# Altium PCB Arduino_MEGA_2560-Rev3.PcbDoc (part 2 of 2)
Units mm, origin at the board's own origin, x right, y up, seen from the top; angles counter-clockwise.
Board outline 101.6 x 53.34 mm, 2 copper layers (Top, Bottom); 63 components, 112 nets, 394 pads, 154 vias.
Unrouted connection lines stored in the file: 1.
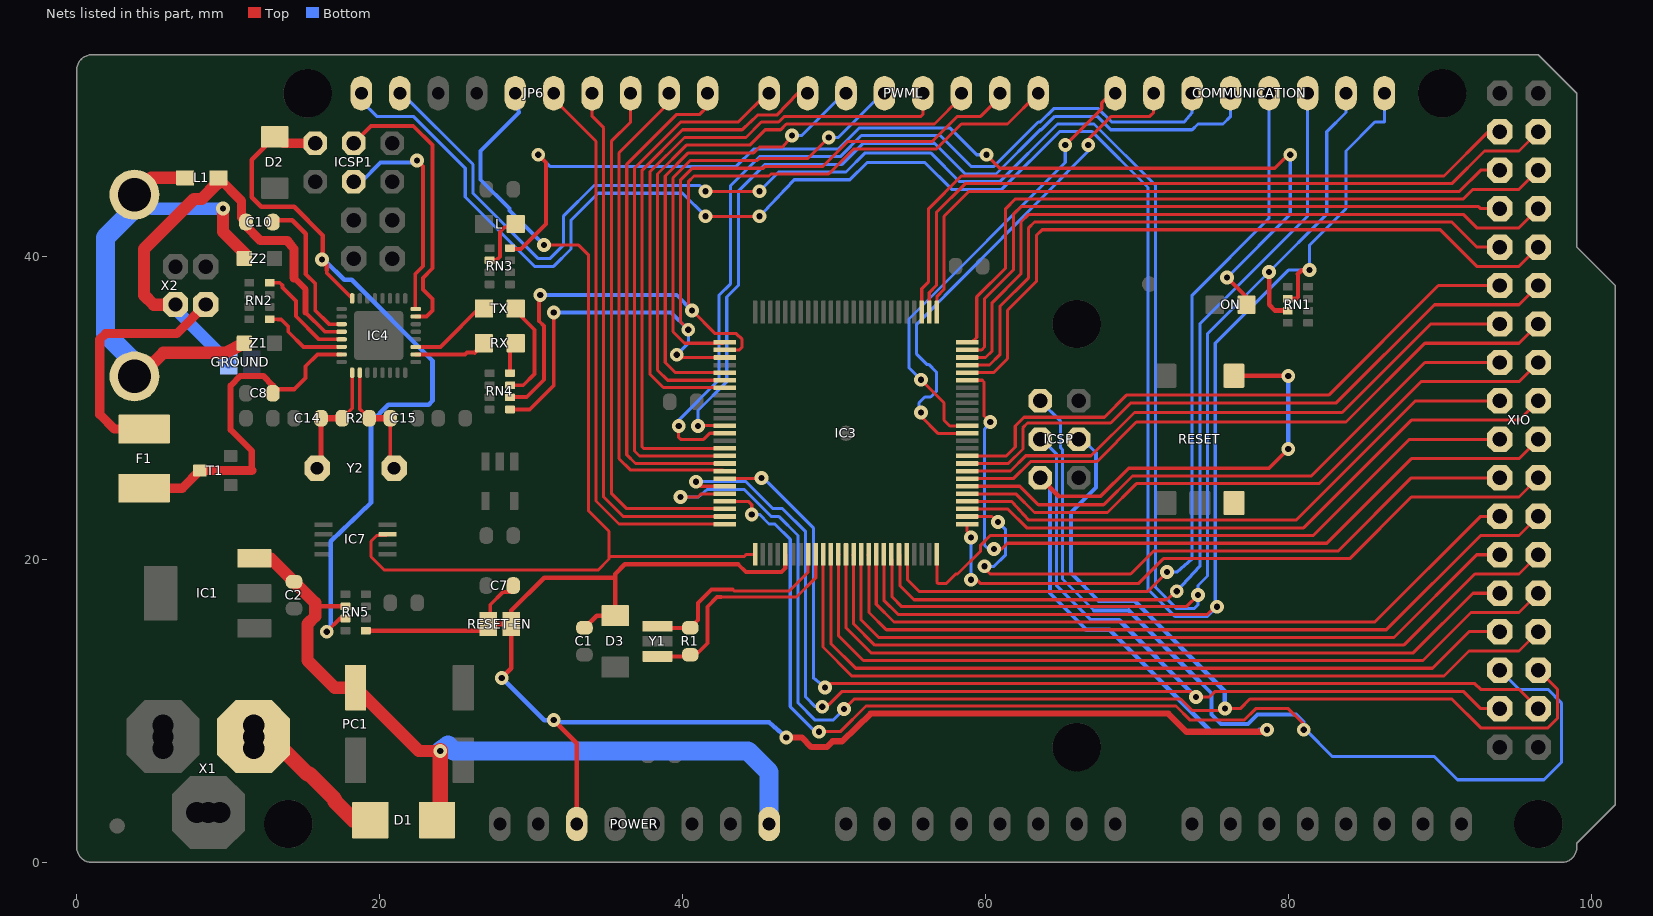
[diagram p2: the nets of this part, all layers, seen from the top]

## Via types
v1: diameter 0.914/0.914 (per signal layer), hole 0.406, Top to Bottom, 154 vias

## Nets (pads, with @x,y where several pads share a name; then routed paths per layer and width w, separated by ;. In a path a pad name is that pad's centre, name@x,y a point inside that pad or via, vN(x,y) a via of type N, cw(c..) or ccw(c..) an arc to the next point about the centre after c; other vN are vias at no path point) (continued)
MOSI2: IC4.16 ICSP1.4 | length 15
  Top w0.254: IC4.16@22.389,36.548 22.389,36.613 22.352,36.703 22.352,38.862 22.86,39.37 22.86,45.974 v1(22.479,46.355)
  Bottom w0.254: ICSP1.4@18.288,44.958 18.796,44.958 20.066,46.228 22.225,46.228 22.352,46.355 v1(22.479,46.355)
N$1: 
N$2: L.A RN3.2 | length 3.6
  Top w0.254: RN3.2@27.265,39.77 27.756,39.821 27.94,40.005 27.94,41.656 28.194,41.91 L.A@28.99,42.164
N$3: ON.A RN3.8 | length 72.5
  Top w0.203: v1(60.071,46.736) 60.96,45.847 79.121,45.847 80.01,46.736 v1(80.137,46.736) ; ON.A@77.216,37.084 ON.A@77.25,36.83
  Top w0.254: RN3.8@28.615,40.57 28.888,40.513 29.337,40.513 30.988,42.164 30.988,46.228 v1(30.48,46.736) ; v1(75.962,38.624) 77.216,37.37 ON.A@77.216,37.084
  Bottom w0.203: v1(30.48,46.736) 31.242,45.974 43.561,45.974 44.704,47.117 50.292,47.117 51.689,48.514 57.658,48.514 59.436,46.736 59.944,46.736 v1(60.071,46.736) ; v1(75.962,38.624) 80.137,42.799 v1(80.137,46.736)
N$54: RN4.4 RX.A | length 2.1
  Top w0.254: RN4.4@28.615,32.315 28.615,33.822 RX.A@28.99,34.29
N$55: RN4.3 TX.A | length 6.7
  Top w0.254: RN4.3@28.615,31.515 29.483,31.515 30.226,32.258 30.226,35.179 28.99,36.415 TX.A@28.99,36.576
PA0: IC3.78 XIO.3 | length 46.8
  Top w0.203: IC3.78@55.8,36.346 55.8,37.893 56.261,38.354 56.261,43.18 58.42,45.339 90.297,45.339 93.218,48.26 XIO.3@93.98,48.26
PA1: IC3.77 XIO.4 | length 48.7
  Top w0.203: IC3.77@56.3,36.346 56.3,37.631 56.769,38.1 56.769,42.926 58.674,44.831 90.805,44.831 92.964,46.99 95.25,46.99 XIO.4@96.52,48.26
PA2: IC3.76 XIO.5 | length 44.5
  Top w0.203: IC3.76@56.8,36.346 56.8,37.369 57.277,37.846 57.277,42.672 58.928,44.323 91.313,44.323 92.71,45.72 XIO.5@93.98,45.72
PA3: IC3.75 XIO.6 | length 46.3
  Top w0.203: IC3.75@58.8,34.346 59.111,34.346 59.436,34.671 59.436,37.354 61.341,39.259 61.341,43.18 61.976,43.815 91.567,43.815 92.202,44.45 95.25,44.45 XIO.6@96.52,45.72
PA4: IC3.74 XIO.7 | length 43.2
  Top w0.203: IC3.74@58.8,33.847 59.755,33.847 59.944,34.036 59.944,37.227 61.849,39.132 61.849,42.799 62.357,43.307 92.583,43.307 92.71,43.18 XIO.7@93.98,43.18
PA5: IC3.73 XIO.8 | length 46.4
  Top w0.203: IC3.73@58.8,33.346 60.016,33.346 60.452,33.782 60.452,36.973 62.357,38.878 62.357,42.291 62.865,42.799 91.567,42.799 92.456,41.91 95.25,41.91 XIO.8@96.52,43.18
PA6: IC3.72 XIO.9 | length 43.6
  Top w0.203: IC3.72@58.8,32.847 60.279,32.847 60.96,33.528 60.96,36.719 62.865,38.624 62.865,41.91 63.246,42.291 90.805,42.291 92.456,40.64 XIO.9@93.98,40.64
PA7: IC3.71 XIO.10 | length 46.8
  Top w0.203: IC3.71@58.8,32.346 60.54,32.346 61.468,33.274 61.468,36.465 63.373,38.37 63.373,41.402 63.754,41.783 90.043,41.783 92.456,39.37 95.25,39.37 XIO.10@96.52,40.64
PB0: IC3.19 XIO.34 | length 66.4
  Top w0.203: IC3.19@42.8,25.346 45.393,25.346 v1(45.212,25.4) ; v1(49.403,11.557) 49.53,11.557 49.784,11.811 92.329,11.811 92.71,11.43 95.25,11.43 XIO.34@96.52,10.16
  Bottom w0.203: v1(45.212,25.4) 45.339,25.4 48.641,22.098 48.641,12.192 v1(49.403,11.557)
PB1: IC3.20 ICSP.3 XIO.33 | length 91.3
  Top w0.203: v1(40.894,25.146) 41.194,24.846 IC3.20@42.8,24.846 ; v1(49.23,10.287) 49.53,10.287 50.546,11.303 73.533,11.303 v1(73.914,10.922) 74.803,10.922 75.184,11.303 91.567,11.303 92.71,10.16 XIO.33@93.98,10.16
  Bottom w0.203: v1(40.894,25.146) 44.196,25.146 45.974,23.368 46.609,23.368 48.133,21.844 48.133,10.922 48.768,10.287 v1(49.23,10.287) ; ICSP.3@63.754,27.94 64.694,27 64.694,18.308 67,16.002
  Bottom w0.254: ICSP.3@63.627,27.94 ICSP.3@63.754,27.94
  Bottom w0.305: 67,16.002 68.834,16.002 v1(73.914,10.922)
PB2: IC3.21 ICSP.4 XIO.32 | length 104.5
  Top w0.203: v1(39.878,24.13) 41.021,24.13 41.237,24.346 IC3.21@42.8,24.346 ; v1(50.673,10.125) 51.343,10.795 72.898,10.795 73.66,10.033 75.692,10.033 v1(75.819,10.16) 76.835,10.16 77.47,10.795 90.805,10.795 92.71,8.89 97.155,8.89 97.79,9.525 97.79,11.43 XIO.32@96.52,12.7
  Bottom w0.203: v1(39.878,24.13) 41.021,24.13 41.656,24.638 44.069,24.638 45.847,22.86 46.355,22.86 47.625,21.59 47.625,10.541 48.768,9.398 49.946,9.398 v1(50.673,10.125) ; ICSP.4@66.167,27.94 66.421,27.94 67.31,27.051
  Bottom w0.254: 67.31,27.051 67.31,24.765 65.659,23.114 65.659,19.105 67.492,17.272
  Bottom w0.305: 67.492,17.272 69.85,17.272 75.819,11.303 v1(75.819,10.16)
PB3: IC3.22 ICSP.1 XIO.31 | length 115.4
  Top w0.203: IC3.22@42.8,23.846 44.353,23.846 44.577,23.622 v1(44.577,22.987) ; v1(49.022,8.636) 50.419,8.636 52.121,10.338 72.593,10.338 73.533,9.398 77.089,9.398 77.851,10.16 80.01,10.16 81.026,9.144 v1(81.026,8.763)
  Bottom w0.203: v1(44.577,22.987) 45.085,22.987 45.72,22.352 46.101,22.352 47.117,21.336 47.117,10.287 48.768,8.636 v1(49.022,8.636) ; ICSP.1@63.627,30.48 64.973,29.134 64.973,27.381 65.1,27.254 65.1,18.72 67.183,16.637 ; v1(81.026,8.763) 81.153,8.763 82.931,6.985 89.662,6.985 91.186,5.461 96.901,5.461 98.044,6.604 98.044,10.541 97.155,11.43 95.25,11.43 XIO.31@93.98,12.7
  Bottom w0.254: 67.183,16.637 69.469,16.637 ; 74.168,11.938 74.93,11.176 74.93,9.779 75.565,9.144 77.343,9.144 77.978,9.779 80.518,9.779 81.026,9.271 v1(81.026,8.763)
  Bottom w0.305: 69.469,16.637 74.168,11.938
PB4: IC3.23 JP6.8 | length 35.1
  Top w0.203: JP6.8@36.576,50.8 36.576,48.895 35.306,47.625 35.306,24.384 36.322,23.368 42.926,23.368 42.904,23.346 IC3.23@42.8,23.346
PB5: IC3.24 JP6.7 | length 35.5
  Top w0.203: JP6.7@34.036,50.8 34.036,49.276 34.798,48.514 34.798,24.13 36.082,22.846 IC3.24@42.8,22.846
PB6: IC3.25 JP6.6 | length 37.4
  Top w0.203: JP6.6@31.496,50.8 31.75,50.165 34.29,47.625 34.29,23.876 35.814,22.352 42.926,22.352 42.92,22.346 IC3.25@42.8,22.346
PB7: IC3.26 IC7.3 JP6.5 | length 65.1
  Top w0.203: IC7.3@20.528,21.66 20.458,21.59 19.812,21.59 19.431,21.209 19.431,20.193 20.32,19.304 34.417,19.304 35.153,20.04 35.153,20.219 ; v1(30.861,40.767) 33.147,40.767 33.782,40.132 33.782,23.241 35.153,21.87 35.153,20.219 ; 37.566,20.193 37.592,20.219 ; IC3.26@44.8,20.346 44.221,20.345 44.095,20.219 37.592,20.219 ; 35.153,20.219 37.592,20.219
  Bottom w0.254: JP6.5@28.956,50.8 29.21,49.53 26.67,46.99 26.67,45.085 28.575,43.18 28.575,43.053 v1(30.861,40.767)
PC0: IC3.53 XIO.18 | length 41.7
  Top w0.203: IC3.53@58.8,23.346 61.49,23.346 62.738,22.098 81.026,22.098 88.138,29.21 95.25,29.21 XIO.18@96.52,30.48
PC1: IC3.54 XIO.17 | length 39
  Top w0.203: IC3.54@58.8,23.846 61.752,23.846 62.865,22.606 80.518,22.606 88.392,30.48 XIO.17@93.98,30.48
PC2: IC3.55 XIO.16 | length 42.3
  Top w0.203: IC3.55@58.8,24.346 62.014,24.346 63.246,23.114 68.072,23.114 69.977,25.019 82.042,25.019 88.773,31.75 95.25,31.75 XIO.16@96.52,33.02
PC3: IC3.56 XIO.15 | length 39.6
  Top w0.203: IC3.56@58.8,24.846 62.276,24.846 63.5,23.622 67.818,23.622 69.723,25.527 81.534,25.527 89.027,33.02 XIO.15@93.98,33.02
PC4: IC3.57 XIO.14 | length 41.9
  Top w0.203: IC3.57@58.8,25.346 61.849,25.349 62.992,26.479 67.386,26.479 69.977,29.083 83.82,29.083 89.027,34.29 95.25,34.29 XIO.14@96.52,35.56
PC5: IC3.58 XIO.13 | length 39.2
  Top w0.203: IC3.58@58.8,25.846 61.66,25.846 62.662,26.86 66.98,26.86 69.85,29.718 83.566,29.718 89.408,35.56 XIO.13@93.98,35.56
PC6: IC3.59 XIO.12 | length 43.4
  Top w0.203: IC3.59@58.8,26.346 61.525,26.346 62.484,27.305 62.484,28.702 62.789,29.019 68.275,29.019 69.621,30.353 83.185,30.353 89.662,36.83 95.25,36.83 XIO.12@96.52,38.1
PC7: IC3.60 XIO.11 | length 40.7
  Top w0.203: IC3.60@58.8,26.846 61.39,26.846 61.976,27.432 61.976,28.829 62.56,29.4 67.869,29.4 69.317,30.861 82.677,30.861 89.916,38.1 XIO.11@93.98,38.1
PD7: IC3.50 XIO.19 | length 43.2
  Top w0.203: IC3.50@56.8,20.346 56.8,18.511 56.896,18.415 57.404,18.415 58.039,19.05 58.166,19.05 59.69,20.574 59.69,20.955 60.3,21.565 60.3,21.59 81.661,21.59 88.011,27.94 XIO.19@93.98,27.94
PE0: IC3.2 PWML.1 RN4.2 | length 58.9
  Top w0.203: IC3.2@42.8,33.847 43.753,33.847 43.942,34.036 43.942,34.544 43.561,34.925 42.164,34.925 v1(40.64,36.449) 40.386,36.703 40.386,44.958 40.767,45.339 45.72,45.339 45.847,45.466 49.657,45.466 51.308,47.117 56.769,47.117 58.42,48.768 61.468,48.768 PWML.1@63.5,50.8
  Top w0.254: RN4.2@28.615,30.715 28.634,30.734 29.718,30.734 30.861,31.877 30.861,35.433 30.537,35.744 30.537,37.395 v1(30.607,37.465)
  Bottom w0.254: v1(30.607,37.465) 39.624,37.465 v1(40.64,36.449)
PE1: IC3.3 PWML.2 RN4.1 | length 56.7
  Top w0.203: v1(39.624,33.528) 39.878,33.274 39.95,33.346 IC3.3@42.8,33.346 ; v1(40.386,35.179) 39.878,35.687 39.878,45.085 40.64,45.847 45.339,45.847 45.466,45.974 49.276,45.974 50.927,47.625 56.515,47.625 58.166,49.276 59.69,49.276 60.96,50.546 PWML.2@60.96,50.8
  Top w0.254: RN4.1@28.615,29.915 29.915,29.915 31.496,31.496 v1(31.496,36.322)
  Bottom w0.203: v1(39.624,33.528) 40.386,34.29 v1(40.386,35.179)
  Bottom w0.254: v1(31.496,36.322) 39.243,36.322 v1(40.386,35.179)
PE3: IC3.5 PWML.6 | length 30.8
  Top w0.203: IC3.5@42.8,32.346 39.536,32.346 38.862,33.02 38.862,45.339 40.386,46.863 44.704,46.863 45.085,47.244 46.609,47.244 v1(47.244,48.006)
  Bottom w0.203: v1(47.244,48.006) 47.879,48.006 50.673,50.8 PWML.6@50.8,50.8
PE4: IC3.6 PWML.3 | length 40.1
  Top w0.203: IC3.6@42.8,31.847 39.019,31.847 38.354,32.512 38.354,45.466 40.259,47.371 44.45,47.371 45.466,48.387 46.482,48.387 46.863,48.768 56.642,48.768 58.42,50.546 PWML.3@58.42,50.8
PE5: IC3.7 PWML.4 | length 39.7
  Top w0.203: IC3.7@42.8,31.346 42.776,31.346 42.545,31.369 38.735,31.369 37.846,32.258 37.846,45.593 40.132,47.879 44.196,47.879 45.212,48.895 46.355,48.895 46.736,49.276 55.753,49.276 55.88,49.403 PWML.4@55.88,50.8
PG0: IC3.51 XIO.22 | length 44.2
  Top w0.203: IC3.51@58.8,22.346 58.8,21.845 v1(59.055,21.463) ; v1(59.055,18.669) 59.436,18.669 59.69,18.415 70.104,18.415 70.358,18.669 71.247,19.558 71.755,20.066 84.074,20.066 88.138,24.13 95.25,24.13 XIO.22@96.52,25.4
  Bottom w0.203: v1(59.055,18.669) v1(59.055,21.463)
PG1: IC3.52 XIO.21 | length 43.2
  Top w0.203: IC3.52@58.8,22.846 60.438,22.846 v1(60.833,22.479) ; v1(59.944,19.558) 59.944,19.431 60.325,19.05 69.596,19.05 71.12,20.574 83.312,20.574 88.138,25.4 XIO.21@93.98,25.4
  Bottom w0.203: v1(59.944,19.558) 60.579,19.558 61.341,20.32 61.341,21.971 v1(60.833,22.479)
PG2: IC3.70 XIO.20 | length 51.9
  Top w0.203: IC3.70@58.8,31.847 59.797,31.847 59.919,31.725 59.919,29.489 v1(60.325,29.083) ; v1(60.579,20.701) 61.087,20.701 61.468,21.082 82.55,21.082 88.138,26.67 95.25,26.67 XIO.20@96.52,27.94
  Bottom w0.203: v1(60.325,29.083) 59.944,28.575 59.944,20.955 60.198,20.701 v1(60.579,20.701)
PG5: IC3.1 PWML.5 | length 30.2
  Top w0.203: IC3.1@42.8,34.346 42.728,34.346 42.672,34.29 40.132,34.29 39.37,35.052 39.37,45.212 40.513,46.355 44.958,46.355 45.085,46.482 48.26,46.482 v1(49.657,47.879)
  Bottom w0.203: v1(49.657,47.879) 50.292,47.879 53.213,50.8 PWML.5@53.34,50.8
PH3: IC3.15 PWML.7 | length 36.8
  Top w0.203: IC3.15@42.8,27.346 37.424,27.346 37.338,27.432 37.338,45.72 40.005,48.387 43.942,48.387 44.958,49.352 46.228,49.352 47.625,50.8 PWML.7@48.26,50.8
PH4: IC3.16 PWML.8 | length 35.7
  Top w0.203: IC3.16@42.8,26.846 37.162,26.846 36.83,27.178 36.83,45.847 39.878,48.895 43.688,48.895 45.593,50.8 PWML.8@45.72,50.8
PH5: IC3.17 JP6.10 | length 33.7
  Top w0.203: JP6.10@41.656,50.8 41.656,49.911 41.148,49.403 39.624,49.403 36.322,46.101 36.322,26.924 36.9,26.346 IC3.17@42.8,26.346
PH6: IC3.18 JP6.9 | length 32.8
  Top w0.203: JP6.9@39.116,50.8 39.116,50.165 35.814,46.863 35.814,26.67 36.576,25.908 42.672,25.908 42.734,25.846 IC3.18@42.8,25.846
PL0: IC3.35 XIO.30 | length 55.4
  Top w0.203: IC3.35@49.276,20.295 49.276,14.224 51.181,12.319 90.297,12.319 91.948,13.97 95.25,13.97 XIO.30@96.52,15.24
  Top w0.254: IC3.35@49.276,20.295 49.301,20.32 49.302,20.346 IC3.35@49.3,20.346
PL1: IC3.36 XIO.29 | length 51.7
  Top w0.203: IC3.36@49.8,20.346 49.8,14.462 51.435,12.827 89.535,12.827 91.948,15.24 XIO.29@93.98,15.24
PL2: IC3.37 XIO.28 | length 54.1
  Top w0.203: IC3.37@50.292,20.295 50.292,14.986 51.943,13.335 88.9,13.335 92.075,16.51 95.25,16.51 XIO.28@96.52,17.78
  Top w0.254: IC3.37@50.292,20.295 50.267,20.32 50.293,20.346 IC3.37@50.3,20.346
PL3: IC3.38 XIO.27 | length 50.3
  Top w0.203: IC3.38@50.8,20.346 50.8,15.494 52.451,13.843 88.265,13.843 92.202,17.78 XIO.27@93.98,17.78
PL4: IC3.39 XIO.26 | length 52.9
  Top w0.203: IC3.39@51.308,20.218 51.308,15.748 52.705,14.351 87.63,14.351 92.329,19.05 95.25,19.05 XIO.26@96.52,20.32
  Top w0.254: IC3.39@51.3,20.346 51.3,20.277 51.333,20.244 IC3.39@51.308,20.218
PL5: IC3.40 XIO.25 | length 49.3
  Top w0.203: IC3.40@51.8,20.346 51.8,16.018 52.959,14.859 86.995,14.859 92.456,20.32 XIO.25@93.98,20.32
PL6: IC3.41 XIO.24 | length 51.6
  Top w0.203: IC3.41@52.324,20.244 52.324,16.51 53.467,15.367 86.487,15.367 92.71,21.59 95.25,21.59 XIO.24@96.52,22.86
  Top w0.254: IC3.41@52.3,20.346 52.3,20.322 52.273,20.295 IC3.41@52.324,20.244
PL7: IC3.42 XIO.23 | length 47.9
  Top w0.203: IC3.42@52.8,20.346 52.8,17.05 53.975,15.875 85.725,15.875 92.71,22.86 XIO.23@93.98,22.86
PWRIN: D1.A X1.2 X1.8 X1.9 | length 10.1
  Top w1.016: X1.2@11.684,8.306 12.37,7.62 13.462,7.62 15.24,5.842 15.367,5.842 17.018,4.191 17.018,4.064 18.288,2.794 D1.A@19.39,2.794
RD+: IC4.29 RN2.4 | length 7
  Top w0.254: RN2.4@12.74,38.284 13.405,38.284 13.589,38.1 13.589,37.973 14.478,37.084 14.478,36.068 15.998,34.548 IC4.29@17.489,34.548
RD-: IC4.30 RN2.1 | length 5.7
  Top w0.254: RN2.1@12.74,35.884 13.279,35.853 13.501,35.853 13.97,35.384 13.97,35.052 14.974,34.048 IC4.30@17.489,34.048
RESET: C1.1 C7.2 D3.A IC3.30 ICSP.5 POWER.3 RESET-EN.1 RESET-EN.2 RESET.3 RESET.4 RN5.1 | length 158.1
  Top w0.254: RESET-EN.1@27.178,15.748 27.305,15.875 27.305,17.018 28.155,17.868 C7.2@28.79,17.868 ; 43.688,19.685 44.196,19.177 46.533,19.177 46.8,19.444 ; 64.846,24.181 67.615,24.181 69.469,26.035 78.74,26.035 v1(80.01,27.305)
  Top w0.305: RN5.1@19.09,15.31 26.74,15.31 RESET-EN.1@27.178,15.748 ; RESET-EN.1@27.305,15.367 RESET-EN.1@27.178,15.748 ; v1(28.067,12.192) 28.702,12.827 RESET-EN.2@28.702,15.748 ; C7.2@28.79,17.868 C7.2@28.829,18.288 ; v1(31.496,9.398) 33.02,7.874 POWER.3@33.02,2.54 ; C1.1@33.528,15.494 34.339,16.305 D3.A@35.56,16.305 35.56,18.796 ; 43.688,19.685 36.195,19.685 35.56,19.05 35.56,18.796 ; 46.8,19.444 IC3.30@46.8,20.346 ; ICSP.5@63.627,25.4 64.846,24.181 ; RESET.4@76.418,32.14 76.427,32.131 v1(80.01,32.131) ; RESET-EN.1@27.178,15.748 RESET-EN.2@28.702,15.748 ; RESET-EN.2@28.702,15.748 28.702,16.637 30.861,18.796 35.56,18.796
  Top w0.406: v1(46.855,8.263) 47.879,8.255 48.514,7.62 49.53,7.62 49.911,8.001 50.546,8.001 52.426,9.83 72.085,9.83 73.279,8.636 78.486,8.636 v1(78.613,8.763)
  Bottom w0.254: ICSP.5@63.754,25.273 64.262,24.765 64.262,17.78 66.675,15.367
  Bottom w0.305: v1(28.067,12.192) 30.861,9.398 v1(31.496,9.398) 31.623,9.271 45.72,9.271 v1(46.855,8.263) ; ICSP.5@63.627,25.4 ICSP.5@63.754,25.273 ; 66.675,15.367 68.199,15.367 74.93,8.636 77.978,8.636 78.105,8.763 v1(78.613,8.763) ; v1(80.01,27.305) v1(80.01,32.131)
RESET2: D2.A IC4.24 ICSP1.5 RN5.7 | length 53.4
  Top w0.254: v1(16.51,15.24) 17.38,16.11 RN5.7@17.74,16.11 ; 16.51,39.116 16.51,38.927 IC4.24@18.189,37.248
  Top w0.305: D2.A@13.081,47.928 11.557,46.404 11.557,43.942 12.192,43.307 14.351,43.307 16.256,41.402 16.256,39.751 v1(16.192,39.814) 16.51,39.497 16.51,39.116 ; ICSP1.5@14.986,47.498 ICSP1.5@15.748,47.498 ; v1(16.51,15.24) v1@16.58,15.31
  Top w0.61: D2.A@13.081,47.928 13.638,47.498 ICSP1.5@15.748,47.498
  Bottom w0.305: v1(16.192,39.814) 16.447,39.688 17.653,38.481 18.147,38.481 23.495,33.133 23.495,30.48 23.241,30.226 20.574,30.226 19.431,29.083 19.431,23.749 16.764,21.209 16.764,15.24 v1(16.51,15.24)
RXD1: COMMUNICATION.3 IC3.45 | length 57.4
  Top w0.203: IC3.45@54.3,20.346 54.33,20.346 54.356,20.32 54.356,18.288 55.296,17.348 71.958,17.348 v1(72.644,17.907)
  Bottom w0.203: v1(72.644,17.907) 74.168,19.558 74.168,35.56 81.28,42.672 COMMUNICATION.3@81.28,50.8
RXD2: COMMUNICATION.5 IC3.12 | length 56.9
  Top w0.203: v1(41.021,28.829) 41.039,28.847 IC3.12@42.8,28.847
  Bottom w0.203: v1(41.021,28.829) 41.021,29.845 42.926,31.75 42.926,37.338 43.688,38.1 43.688,44.323 45.466,46.101 50.546,46.101 51.943,47.498 56.642,47.498 58.674,45.466 60.706,45.466 63.627,48.387 63.703,48.387 64.592,49.276 67.386,49.276 68.275,48.387 73.66,48.387 74.041,48.768 75.692,48.768 76.2,49.276 COMMUNICATION.5@76.2,50.8
RXD3: COMMUNICATION.7 IC3.63 | length 34.2
  Top w0.203: v1(55.753,29.718) 55.753,29.464 56.896,28.321 58.801,28.321 IC3.63@58.8,28.346 ; v1(66.802,47.371) 66.802,47.752 68.326,49.276 70.866,49.276 71.12,49.53 COMMUNICATION.7@71.12,50.8
  Bottom w0.203: v1(55.753,29.718) 55.626,29.845 55.626,30.353 56.007,30.734 56.388,30.734 56.769,31.115 56.769,32.385 56.261,32.893 56.134,32.893 55.448,33.604 55.448,35.509 66.802,46.99 v1(66.802,47.371)
RXL: IC4.10 RX.C | length 4.8
  Top w0.254: IC4.10@22.389,33.548 25.634,33.548 25.761,33.675 26.275,33.675
  Top w0.305: 26.275,33.675 RX.C@26.89,34.29
SCK2: IC4.15 ICSP1.3 | length 18.9
  Top w0.254: ICSP1.3@18.288,47.498 19.431,48.641 22.225,48.641 23.495,47.371 23.495,39.243 22.86,38.608 22.86,37.846 23.495,37.211 23.495,36.449 23.094,36.048 IC4.15@22.389,36.048
SCL: COMMUNICATION.1 IC3.43 JP6.1 RN1.2 | length 167.8
  Top w0.203: v1(41.529,42.672) v1(45.085,42.672) ; IC3.43@53.3,20.346 53.3,17.312 54.229,16.383 74.676,16.383 75.057,16.764 v1(75.311,16.891)
  Top w0.254: 80.537,37.23 80.645,37.338 80.645,38.862
  Top w0.305: RN1.2@79.97,37.23 80.537,37.23 ; 80.645,38.862 80.899,39.116 v1(81.407,39.116)
  Bottom w0.203: JP6.1@18.796,50.8 18.796,50.292 19.812,49.276 22.225,49.276 25.654,45.847 25.654,43.942 30.226,39.37 31.496,39.37 32.639,40.513 32.639,42.418 34.417,44.196 40.005,44.196 v1(41.529,42.672) ; v1(45.085,42.672) 45.339,42.926 47.371,45.085 51.054,45.085 52.197,46.228 56.007,46.228 57.785,44.45 61.087,44.45 64.897,48.26 67.056,48.26 70.739,44.577 70.739,18.034 72.517,16.256 74.676,16.256 v1(75.311,16.891) 75.184,17.018 75.184,34.29 80.01,39.116 v1(81.407,39.116) 81.407,40.767 83.82,43.18 83.82,46.99 85.725,48.895 86.36,48.895 COMMUNICATION.1@86.36,50.8
SDA: COMMUNICATION.2 IC3.44 JP6.2 RN1.3 | length 158.9
  Top w0.203: v1(41.529,44.323) v1(45.085,44.323) ; IC3.44@53.8,20.346 53.8,20.145 53.797,20.041 53.848,19.939 53.848,17.526 54.483,16.891 73.279,16.891 v1(74.041,17.653)
  Top w0.305: v1(78.74,38.989) 78.74,36.83 79.121,36.449 79.951,36.449 RN1.3@79.97,36.43
  Bottom w0.203: JP6.2@21.336,50.8 21.463,50.8 26.162,46.101 26.162,44.196 30.48,39.878 31.242,39.878 32.131,40.767 32.131,42.672 34.163,44.704 41.148,44.704 v1(41.529,44.323) ; v1(45.085,44.323) 46.355,45.593 50.8,45.593 52.07,46.863 56.388,46.863 58.293,44.958 60.96,44.958 64.77,48.768 67.183,48.768 71.247,44.704 71.247,18.161 72.644,16.764 73.787,16.764 74.041,17.018 v1(74.041,17.653) 74.041,18.288 74.676,18.923 74.676,34.925 v1(78.74,38.989) 82.55,42.799 82.55,48.26 83.82,49.53 COMMUNICATION.2@83.82,50.8
TXD1: COMMUNICATION.4 IC3.46 | length 54.5
  Top w0.203: IC3.46@54.8,20.346 54.8,20.257 54.864,20.193 54.864,18.669 55.626,17.907 70.739,17.907 v1(72.009,19.177)
  Bottom w0.203: v1(72.009,19.177) 72.644,19.177 73.66,20.066 73.66,37.465 78.74,42.545 COMMUNICATION.4@78.74,50.8
TXD2: COMMUNICATION.6 IC3.13 | length 57.5
  Top w0.203: v1(39.751,28.829) 39.751,28.067 39.878,27.94 41.402,27.94 41.808,28.346 IC3.13@42.8,28.346
  Bottom w0.203: v1(39.751,28.829) 39.751,29.21 42.418,31.877 42.418,37.465 43.18,38.227 43.18,44.704 45.085,46.609 50.419,46.609 51.816,48.006 57.023,48.006 59.055,45.974 60.579,45.974 63.5,48.895 63.627,48.895 64.516,49.784 67.462,49.784 68.351,48.895 73.152,48.895 73.66,49.53 COMMUNICATION.6@73.66,50.8
TXD3: COMMUNICATION.8 IC3.64 | length 30
  Top w0.203: v1(55.753,31.877) 57.277,30.353 57.277,29.21 57.658,28.829 58.547,28.829 58.657,28.847 IC3.64@58.8,28.847 ; v1(65.278,47.371) 67.691,49.784 67.691,50.165 68.326,50.8 COMMUNICATION.8@68.58,50.8
  Bottom w0.203: v1(55.753,31.877) 54.966,32.664 54.966,35.89 65.278,46.228 v1(65.278,47.371)
TXL: IC4.11 TX.C | length 5.8
  Top w0.254: IC4.11@22.389,34.048 24.015,34.048 26.797,36.83 TX.C@26.89,36.576
UGND: C10.2 GROUND.1 IC4.28 L1.1 X2.4 | length 33
  Top w0.254: 15.113,36.322 16.387,35.048 IC4.28@17.489,35.048
  Top w0.406: 14.351,38.608 15.113,37.846 15.113,36.322
  Top w0.61: L1.1@9.355,45.212 10.879,43.688 10.879,42.588 C10.2@11.176,42.291 11.088,42.125 12.116,41.072 13.894,41.072 14.351,40.513 14.351,38.608
  Top w0.813: X2.4@6.52,36.85 6.5,36.83 5.08,36.83 4.445,37.465 4.445,40.513 7.747,43.815 8.255,43.815 9.271,44.831 9.271,45.128 L1.1@9.355,45.212
  Bottom w0.813: X2.4@6.52,36.85 6.52,36.533 GROUND.1@10.033,33.02
USBVCC: C8.1 F1.1 IC4.31 T1.1 | length 23.7
  Top w0.254: 14.351,31.242 15.113,32.004 15.113,32.766 15.895,33.548 IC4.31@17.489,33.548
  Top w0.305: C8.1@12.954,30.988 13.208,31.242 14.351,31.242
  Top w0.406: 11.557,25.883 11.557,27.178 10.16,28.575 10.16,31.496 10.795,32.131 12.319,32.131 12.954,31.496 C8.1@12.954,30.988
  Top w0.61: F1.1@4.445,24.72 6.965,24.72 T1.1@8.128,25.883 11.557,25.883
USHIELD: L1.2 X2.P$1 X2.P$2 Z1.1 Z2.1 | length 36
  Top w0.813: X2.P$2@3.81,32.1 3.81,33.02 5.08,33.02 5.715,33.655 9.795,33.655 Z1.1@11.065,34.29 ; X2.P$1@3.81,44.1 4.922,45.212 L1.2@7.155,45.212 ; v1(9.652,43.18) 9.652,41.656 11.065,40.243 Z2.1@11.065,39.878
  Bottom w0.813: X2.P$1@3.81,44.1 4.984,43.18 v1(9.652,43.18)
  Bottom w1.27: X2.P$2@3.81,32.1 3.81,33.02 1.905,34.925 1.905,41.275 3.81,43.18 X2.P$1@3.81,44.1
VIN: C2.1 D1.C IC1.3 PC1.+ POWER.8 RN5.6 | length 53.2
  Top w0.203: IC1.3@11.735,20.091 IC1.3@11.766,20.06
  Top w0.305: 15.748,17.145 15.983,16.91 RN5.6@17.74,16.91
  Top w0.813: IC1.3@11.766,20.06 12.833,20.06 C2.1@14.351,18.542 15.748,17.145 15.748,16.256 15.24,15.748 15.24,13.335 17.031,11.544 PC1.+@18.415,11.544 22.593,7.366 v1(24.003,7.366)
  Top w1.016: D1.C@23.79,2.794 24.003,3.007 v1(24.003,7.366)
  Bottom w1.27: v1(24.003,7.366) 24.511,7.747 24.892,7.366 44.323,7.366 45.72,5.969 POWER.8@45.72,2.54
VUCAP: C10.1 IC4.27 | length 10
  Top w0.254: 15.113,38.862 15.748,38.227 15.748,36.449 16.649,35.548 IC4.27@17.489,35.548
  Top w0.305: C10.1@12.954,42.291 13.169,42.418 14.224,42.418 15.113,41.529 15.113,38.862
XT1: C14.1 IC4.1 R2.1 Y2.2 | length 8.4
  Top w0.254: R2.1@17.803,29.337 R2.1@17.526,29.337 18.189,30 IC4.1@18.189,32.348
  Top w0.305: Y2.2@15.875,26.035 16.129,26.289 C14.1@16.129,29.337
  Top w0.406: C14.1@16.129,29.337 R2.1@17.526,29.337
XT2: C15.1 IC4.2 R2.2 Y2.1 | length 8.1
  Top w0.254: IC4.2@18.689,32.348 18.689,29.952 R2.2@19.304,29.337 ; C15.1@20.701,29.337 20.701,26.289 Y2.1@20.955,26.035
  Top w0.406: R2.2@19.304,29.337 C15.1@20.701,29.337
XTAL1: IC3.34 R1.1 Y1.3 | length 15.5
  Top w0.203: 42.545,17.526 47.53,17.526 48.8,18.796 IC3.34@48.8,20.346
  Top w0.254: Y1.3@38.354,13.605 39.894,13.605 R1.1@40.513,13.716 40.894,13.716 41.656,14.478 41.656,16.891 42.291,17.526 42.545,17.526
XTAL2: IC3.33 R1.2 Y1.1 | length 14.8
  Top w0.203: 43.307,18.034 43.409,17.932 47.055,17.932 48.3,19.177 IC3.33@48.3,20.346
  Top w0.254: Y1.1@37.83,15.605 Y1.1@38.354,15.605 37.957,15.605 38.068,15.494 R1.2@40.513,15.494 41.021,16.002 41.021,17.145 41.91,18.034 43.307,18.034
XVCC: F1.2 X2.1 | length 16.2
  Top w0.61: F1.2@4.445,28.62 2.495,28.62 1.524,29.591 1.524,34.544 1.905,34.925 6.595,34.925 X2.1@8.52,36.85
pads on no net: FD1.P$1 FD2.P$1 FD3.P$1 FD4.P$1 IC3.4 IC3.8 IC3.9 IC3.14 IC3.27 IC3.28 IC3.29 IC3.47 IC3.48 IC3.49 IC3.65 IC3.66 IC3.67 IC3.68 IC3.69 IC3.79 IC4.5 IC4.6 IC4.7 IC4.12 IC4.14 IC4.22 IC4.23 IC4.25 IC4.26 IC6.4 POWER.1 RN1.1 RN1.4 RN1.5 RN1.8 RN2.2 RN2.3 RN2.6 RN2.7 RN3.3 RN3.6

## Polygon pours and split planes (outlines as drawn)
N$1 on Top "Polygon_1_Net_N$1" (solid, remove dead copper, pour order 0): 0.533,52.807 10.795,52.807 11.278,52.807 11.278,46.761 0.533,46.761
GND on Top "Polygon_1_Net_GND" (solid, remove dead copper, pour order 3): 0.533,52.807 101.702,52.807 101.702,0.533 0.533,0.533 0.533,29.947 10.693,29.947 10.693,46.253 0.533,46.253
+5V on Top "Polygon_1_Net_+5V" (solid, remove dead copper, pour order 1): 9.677,13.183 9.677,29.997 0.483,29.997 0.483,13.183
GND on Bottom "Polygon_2_Net_GND" (solid, remove dead copper, pour order 4): 0.533,52.807 101.642,52.807 102.337,52.112 102.337,0.533 1.228,0.533 0.533,1.228 0.533,29.947 10.693,29.947 10.693,46.253 0.533,46.253
+5V on Bottom "Polygon_2_Net_+5V" (solid, remove dead copper, pour order 2): 1.118,13.183 1.118,29.997 10.947,29.997 10.947,13.183

## Keep-outs
Keep-Out Layer:
  the board outline again, w0.254

## Other copper
Top:
  text "MEGAXL-Rev3b" at 1.945,3.91 h0.69 r90

## Silkscreen, mask and mechanical layers (free items; w line width, h text height)
Top Overlay:
  lines w0.406: 60.325,45.72 60.96,46.355 ; 60.325,45.72 60.96,45.72 ; 60.325,45.72 60.96,46.99 61.595,45.72 ; 60.96,45.72 61.595,45.72 ; 60.96,45.72 60.96,46.355 ; 60.96,46.355 61.595,45.72 ; 62.865,46.99 63.5,46.355 ; 62.865,46.99 63.5,45.72 64.135,46.99 ; 62.865,46.99 63.5,46.99 ; 63.5,46.355 63.5,46.99 ; 63.5,46.355 64.135,46.99 ; 63.5,46.99 64.135,46.99
  text "SCL" at 18.766,54.724 h1.21 r90
  text "SDA" at 21.56,54.597 h1.21 r90
  text "M.Banzi" at -6.624,52.369 h0.97
  text "5V" at 91.889,52.009 h0.95
  text "D.Cuartielles" at -12.128,50.464 h0.97
  text "MADE IN" at 1.524,50.292 h1.51
  text "T.Igoe" at -5.815,48.883 h0.97
  text "ITALY" at 3.556,47.244 h1.51
  text "G.Martino" at -8.567,46.654 h0.97
  text "GND" at 27.413,45.478 h1.21 r90
  text "D.Mellis" at -7.434,44.749 h0.97
  text "PWM" at 41.275,44.196 h1.42
  text "AREF" at 24.735,44.183 h1.21 r90
  text "TX" at 61.595,42.418 h1.21 r90
  text "RX" at 64.135,42.418 h1.21 r90
  text "TX3" at 69.215,42.418 h1.21 r90
  text "RX3" at 71.755,42.418 h1.21 r90
  text "TX2" at 74.295,42.418 h1.21 r90
  text "RX2" at 76.835,42.418 h1.21 r90
  text "TX1" at 79.375,42.418 h1.21 r90
  text "RX1" at 81.915,42.418 h1.21 r90
  text "SDA" at 84.455,42.418 h1.21 r90
  text "SCL" at 86.995,42.418 h1.21 r90
  text "1" at 62.116,30.151 h1.08
  text "DIGITAL" at 89.535,23.495 h1.42 r90
  text "Arduino" at 50.165,13.97 h2.37
  text "MEGA 2560" at 50.165,10.16 h2.7
  text "ANALOG   IN" at 55.245,7.366 h1.42
  text "GND" at 97.536,5.08 h1.21
  text "5V" at 37.071,4.272 h1.21
  text "GND" at 40.119,4.272 h1.21
  text "VIN" at 44.488,4.272 h1.21
  text "IOREF" at 31.085,4.254 h1.21 r90
  text "RESET" at 33.752,4.254 h1.21 r90
  text "3V3" at 36.292,4.254 h1.21 r90
Bottom Overlay:
  text "MADE IN" at 54.61,31.115 h1.21
  text "designed by" at 90.17,30.48 h1.21
  text "ITALY" at 53.34,29.21 h1.21
  text "tinker it" at 88.265,28.575 h1.21
Dimension:
  the board outline again, w0.254
tPlace:
  circle w0.305: c22.225,48.514 r0.18
  lines w0.305: 29.337,45.974 30.226,45.085 40.64,45.085 ; 46.228,45.085 57.404,45.085 58.42,46.101 ; 50.927,7.112 51.943,8.128 53.975,8.128 ; 61.087,42.164 62.23,41.021 63.5,41.021 ; 72.644,8.128 90.043,8.128 90.932,7.239 ; 83.439,41.021 85.217,41.021 86.36,42.164 ; 88.773,22.987 88.773,11.303 89.789,10.287 ; 88.773,33.528 88.773,47.244 89.789,48.26 ; 93.98,5.715 93.98,5.207 96.52,5.207 96.52,5.715 ; 93.98,52.07 93.98,52.705 96.52,52.705 96.52,52.07
  text "9" at 40.005,47.625 h1.21 r90
  text "8" at 42.545,47.625 h1.21 r90
  text "7" at 46.355,47.625 h1.21 r90
  text "6" at 48.895,47.625 h1.21 r90
  text "5" at 51.435,47.625 h1.21 r90
  text "4" at 53.975,47.625 h1.21 r90
  text "3" at 56.515,47.625 h1.21 r90
  text "2" at 59.055,47.625 h1.21 r90
  text "1" at 61.595,47.625 h1.21 r90
  text "0" at 64.135,47.625 h1.21 r90
  text "22" at 90.17,47.625 h1.21
  text "14" at 69.215,46.736 h1.21 r90
  text "15" at 71.755,46.736 h1.21 r90
  text "16" at 74.295,46.736 h1.21 r90
  text "17" at 76.835,46.736 h1.21 r90
  text "18" at 79.375,46.736 h1.21 r90
  text "19" at 81.915,46.736 h1.21 r90
  text "20" at 84.455,46.736 h1.21 r90
  text "21" at 86.995,46.736 h1.21 r90
  text "13" at 29.845,46.355 h1.21 r90
  text "12" at 32.385,46.355 h1.21 r90
  text "11" at 34.925,46.355 h1.21 r90
  text "10" at 37.465,46.355 h1.21 r90
  text "24" at 90.17,45.085 h1.21
  text "26" at 90.17,42.545 h1.21
  text "28" at 90.17,40.005 h1.21
  text "30" at 90.17,37.465 h1.21
  text "31" at 98.425,37.465 h1.21
  text "32" at 90.17,34.925 h1.21
  text "33" at 98.425,34.925 h1.21
  text "34" at 90.17,32.385 h1.21
  text "35" at 98.425,32.385 h1.21
  text "36" at 90.17,29.845 h1.21
  text "37" at 98.425,29.845 h1.21
  text "38" at 90.17,27.305 h1.21
  text "39" at 98.425,27.305 h1.21
  text "40" at 90.17,24.765 h1.21
  text "41" at 98.425,24.765 h1.21
  text "42" at 90.17,22.225 h1.21
  text "43" at 98.425,22.225 h1.21
  text "www.arduino.cc" at 61.468,20.32 h1.86
  text "44" at 90.17,19.685 h1.21
  text "45" at 98.425,19.685 h1.21
  text "46" at 90.17,17.145 h1.21
  text "47" at 98.425,17.145 h1.21
  text "TM" at 66.421,15.367 h0.86
  text "48" at 90.17,14.605 h1.21
  text "49" at 98.425,14.605 h1.21
  text "50" at 90.17,12.065 h1.21
  text "51" at 98.425,12.065 h1.21
  text "52" at 90.17,9.525 h1.21
  text "53" at 98.425,9.525 h1.21
  text "0" at 51.562,4.699 h1.21 r90
  text "1" at 53.848,4.699 h1.21 r90
  text "2" at 56.642,4.699 h1.21 r90
  text "3" at 59.182,4.699 h1.21 r90
  text "4" at 61.722,4.699 h1.21 r90
  text "5" at 64.135,4.699 h1.21 r90
  text "6" at 66.675,4.699 h1.21 r90
  text "7" at 69.342,4.699 h1.21 r90
  text "8" at 74.422,4.699 h1.21 r90
  text "9" at 76.962,4.699 h1.21 r90
  text "10" at 79.502,4.699 h1.21 r90
  text "11" at 82.042,4.699 h1.21 r90
  text "12" at 84.582,4.699 h1.21 r90
  text "13" at 87.122,4.699 h1.21 r90
  text "14" at 89.662,4.699 h1.21 r90
  text "15" at 92.075,4.699 h1.21 r90
Unrouted:
  lines w0: 76.418,23.74 78.74,26.035
ReferenceLC:
  text "L" at 30.353,41.402 h1.08
  text "ON" at 72.771,37.846 h1.08
  text "TX" at 29.845,35.941 h1.08
  text "RX" at 29.845,33.655 h1.08
  text "PC2" at 24.003,8.763 h1.08
  text "PC1" at 17.018,8.636 h1.08

## Text inside footprints (layer, text, board x,y; h text height)
IC1: tPlace "2" at 12.963,16.489 h0.69 r90; tPlace "1" at 12.954,14.327 h0.69 r90; tPlace "4" at 6.096,19.685 h0.69 r90; tPlace "3" at 12.954,18.801 h0.69 r90
IC3: tDocu "R" at 54.19,27.276 h0.52; tDocu "TQFP 100" at 47.99,25.866 h0.69
IC4: tPlace "1" at 17.939,31.698 h0.69 r90
U$1: Top "ARDUINO is a registered trademark." at -19.9,-18.079 h1.42; Top "The product information on the Web Site or Materials is subject to change without notice. Do not finalize a design with this information." at -19.9,-15.031 h1.08; Top "these for future definition and shall have no responsibility whatsoever for conflicts or incompatibilities arising from future changes to them." at -19.9,-11.983 h1.08; Top "rely on the absence or characteristics of any features or instructions marked \"reserved\" or \"undefined.\" Arduino reserves" at -19.9,-9.951 h1.08; Top "Arduino may make changes to specifications and product descriptions at any time, without notice. The Customer must not" at -19.9,-7.919 h1.08; Top "REGARDING PRODUCTS, INCLUDING BUT NOT LIMITED TO, ANY IMPLIED WARRANTIES OF MERCHANTABILITY OR FITNESS FOR A PARTICULAR PURPOSE" at -19.9,-4.871 h1.08; Top "Reference Designs ARE PROVIDED \"AS IS\" AND \"WITH ALL FAULTS. Arduino DISCLAIMS ALL OTHER WARRANTIES, EXPRESS OR IMPLIED," at -19.9,-2.839 h1.08